# EAGLE board power_controller (EAGLE 5.03)
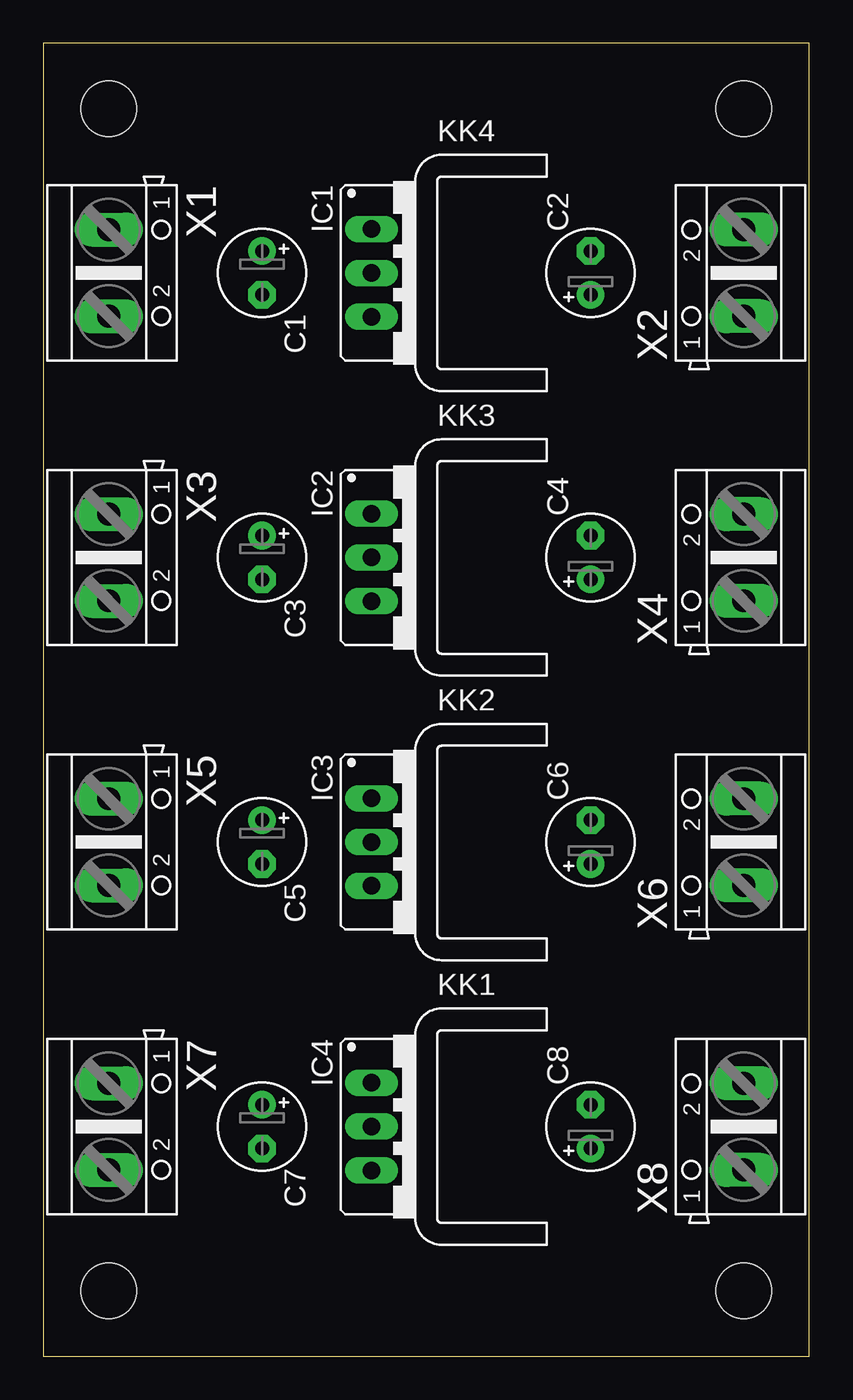
[diagram p0: board, top side]
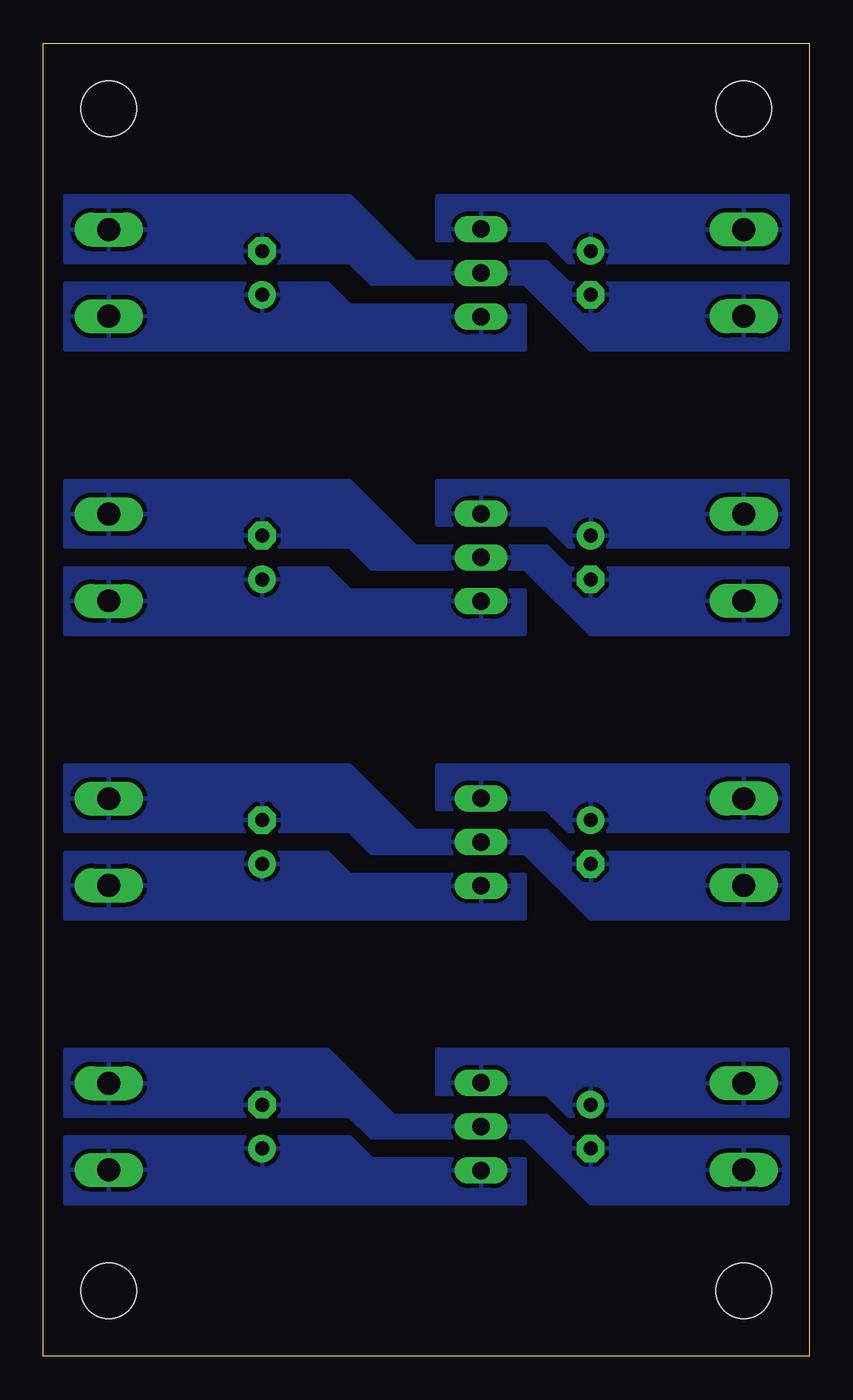
[diagram p1: board, bottom side, seen from below]

Size 44.45 x 76.2 mm. Coordinates in mm from the lower left corner, seen from the top.
Outline: 0,0 44.45,0 44.45,76.2 0,76.2 0,0
Copper layers (1*16): Top 0.035mm / dielectric 1.5mm / Bottom 0.035mm
Design rules "default": minimum track width 10mil, minimum drill 24mil, track to track 8mil, track to pad 8mil, pad to pad 8mil, via to via 8mil, smd to smd 8mil, copper to edge 40mil, drill to drill 8mil, minimum pad ring 10mil, minimum via ring 8mil, stop-mask expansion 4mil, vias tented up to drill 0mil, thermal gap 10mil
Holes 3.2 mm at 3.81,72.39 40.64,72.39 3.81,3.81 40.64,3.81

## Footprints (pad centres in the part's own frame; a part is rotated, then mirrored left to right if it is on the bottom)
E2,5-5 = drill 0.813 pad 1.6 round: + -1.27,0 | drill 0.813 pad 1.6 octagon: - 1.27,0
78XXS = drill 1.016 long: GND 0,-2.54; IN -2.54,-2.54; OUT 2.54,-2.54
AK500/2 = drill 1.321 long: 1 -2.515,0; 2 2.515,0

## Placement (x,y rotation side)
C1  0.33uF  [E2,5-5]  12.7,62.87 270 top
C2  0.1uF  [E2,5-5]  31.75,62.87 90 top
C3  0.33uF  [E2,5-5]  12.7,46.35 270 top
C4  0.1uF  [E2,5-5]  31.75,46.35 90 top
C5  0.33uF  [E2,5-5]  12.7,29.84 270 top
C6  0.1uF  [E2,5-5]  31.75,29.84 90 top
C7  0.33uF  [E2,5-5]  12.7,13.34 270 top
C8  0.1uF  [E2,5-5]  31.75,13.34 90 top
IC1  5V  [78XXS]  21.59,62.87 270 top
IC2  5V  [78XXS]  21.59,46.35 270 top
IC3  5V  [78XXS]  21.59,29.84 270 top
IC4  5V  [78XXS]  21.59,13.34 270 top
KK1  D03S  [D03S]  22.86,13.34 270 top
KK2  D03S  [D03S]  22.86,29.84 270 top
KK3  D03S  [D03S]  22.86,46.35 270 top
KK4  D03S  [D03S]  22.86,62.87 270 top
X1  IN1  [AK500/2]  3.81,62.87 270 top
X2  OUT1  [AK500/2]  40.64,62.87 90 top
X3  IN2  [AK500/2]  3.81,46.35 270 top
X4  OUT2  [AK500/2]  40.64,46.35 90 top
X5  IN3  [AK500/2]  3.81,29.84 270 top
X6  OUT3  [AK500/2]  40.64,29.84 90 top
X7  IN4  [AK500/2]  3.81,13.34 270 top
X8  OUT4  [AK500/2]  40.64,13.34 90 top

## Library data of the parts
C1-C8 = rcl
IC1-IC4 = v-reg
KK1-KK4 = heatsink
X1-X8 = con-ptr500

## Nets
GND1: C1.- C2.- IC1.GND X1.2 X2.2
GND2: C3.- C4.- IC2.GND X3.2 X4.2
GND3: C5.- C6.- IC3.GND X5.2 X6.2
GND4: C7.- C8.- IC4.GND X7.2 X8.2
VCC_IN1: C1.+ IC1.IN X1.1
VCC_IN2: C3.+ IC2.IN X3.1
VCC_IN3: C5.+ IC3.IN X5.1
VCC_IN4: C7.+ IC4.IN X7.1
VCC_OUT1: C2.+ IC1.OUT X2.1
VCC_OUT2: C4.+ IC2.OUT X4.1
VCC_OUT3: C6.+ IC3.OUT X6.1
VCC_OUT4: C8.+ IC4.OUT X8.1

## Tracks (layer width: path | path; a pad name or v marks a point on that pad's centre or on a via)
GND1
  pour Bottom: 1.27,62.23 13.97,62.23 15.24,63.5 22.86,63.5 26.67,67.31 43.18,67.31 43.18,63.5 26.67,63.5 25.4,62.23 16.51,62.23 12.7,58.42 1.27,58.42
GND2
  pour Bottom: 1.27,45.72 1.27,41.91 12.7,41.91 16.51,45.72 25.4,45.72 26.67,46.99 43.18,46.99 43.18,50.8 26.67,50.8 22.86,46.99 15.24,46.99 13.97,45.72
GND3
  pour Bottom: 43.18,34.29 26.67,34.29 22.86,30.48 15.24,30.48 13.97,29.21 1.27,29.21 1.27,25.4 12.7,25.4 16.51,29.21 25.4,29.21 26.67,30.48 43.18,30.48
GND4
  pour Bottom: 1.27,12.7 13.97,12.7 15.24,13.97 22.86,13.97 24.13,13.97 27.94,17.78 43.18,17.78 43.18,13.97 26.67,13.97 25.4,12.7 16.51,12.7 12.7,8.89 1.27,8.89
VCC_IN1
  pour Bottom: 1.27,63.5 1.27,67.31 21.59,67.31 21.59,64.77 15.24,64.77 13.97,63.5
VCC_IN2
  pour Bottom: 1.27,50.8 21.59,50.8 21.59,48.26 15.24,48.26 13.97,46.99 1.27,46.99
VCC_IN3
  pour Bottom: 1.27,34.29 21.59,34.29 21.59,31.75 15.24,31.75 13.97,30.48 1.27,30.48
VCC_IN4
  pour Bottom: 1.27,17.78 21.59,17.78 21.59,15.24 15.24,15.24 13.97,13.97 1.27,13.97
VCC_OUT1
  pour Bottom: 16.51,60.96 26.67,60.96 27.94,62.23 43.18,62.23 43.18,58.42 16.51,58.42
VCC_OUT2
  pour Bottom: 43.18,41.91 43.18,45.72 27.94,45.72 26.67,44.45 16.51,44.45 16.51,41.91
VCC_OUT3
  pour Bottom: 16.51,25.4 16.51,27.94 26.67,27.94 27.94,29.21 43.18,29.21 43.18,25.4
VCC_OUT4
  pour Bottom: 16.51,11.43 16.51,8.89 43.18,8.89 43.18,12.7 26.67,12.7 25.4,11.43